# Altium PCB PCB.PcbDoc
Units mm, origin at the board's own origin, x right, y up, seen from the top; angles counter-clockwise.
Board outline 28.16 x 27.13 mm, 2 copper layers (Top Layer, Bottom Layer); 14 components, 10 nets, 38 pads, 12 vias.
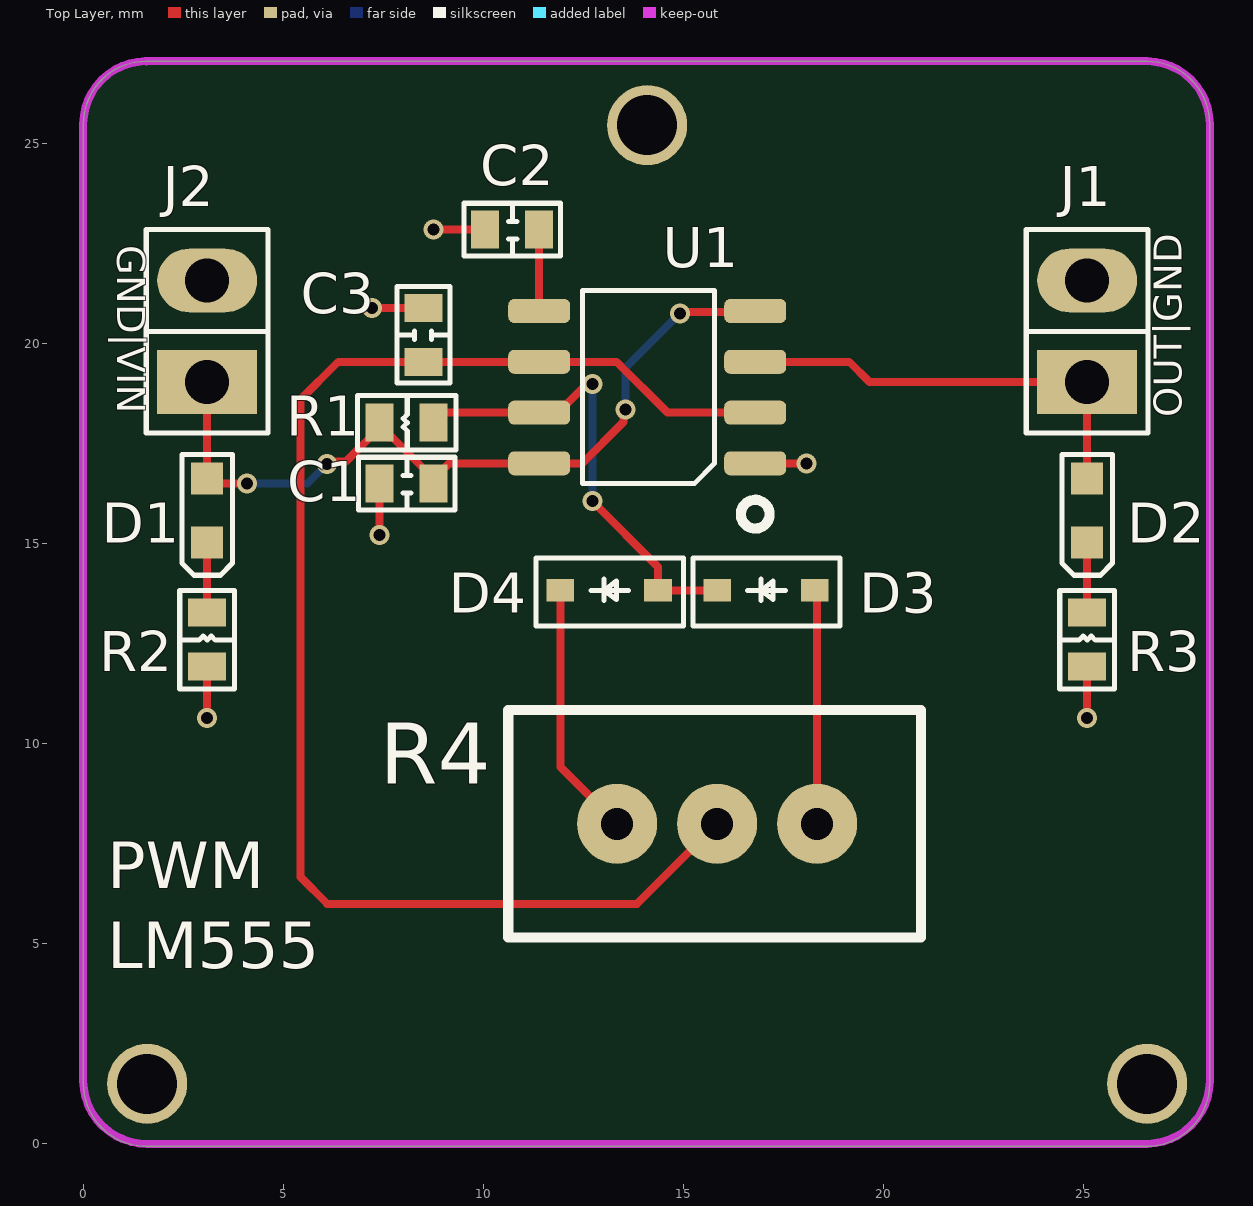
[diagram p0: Top Layer view]
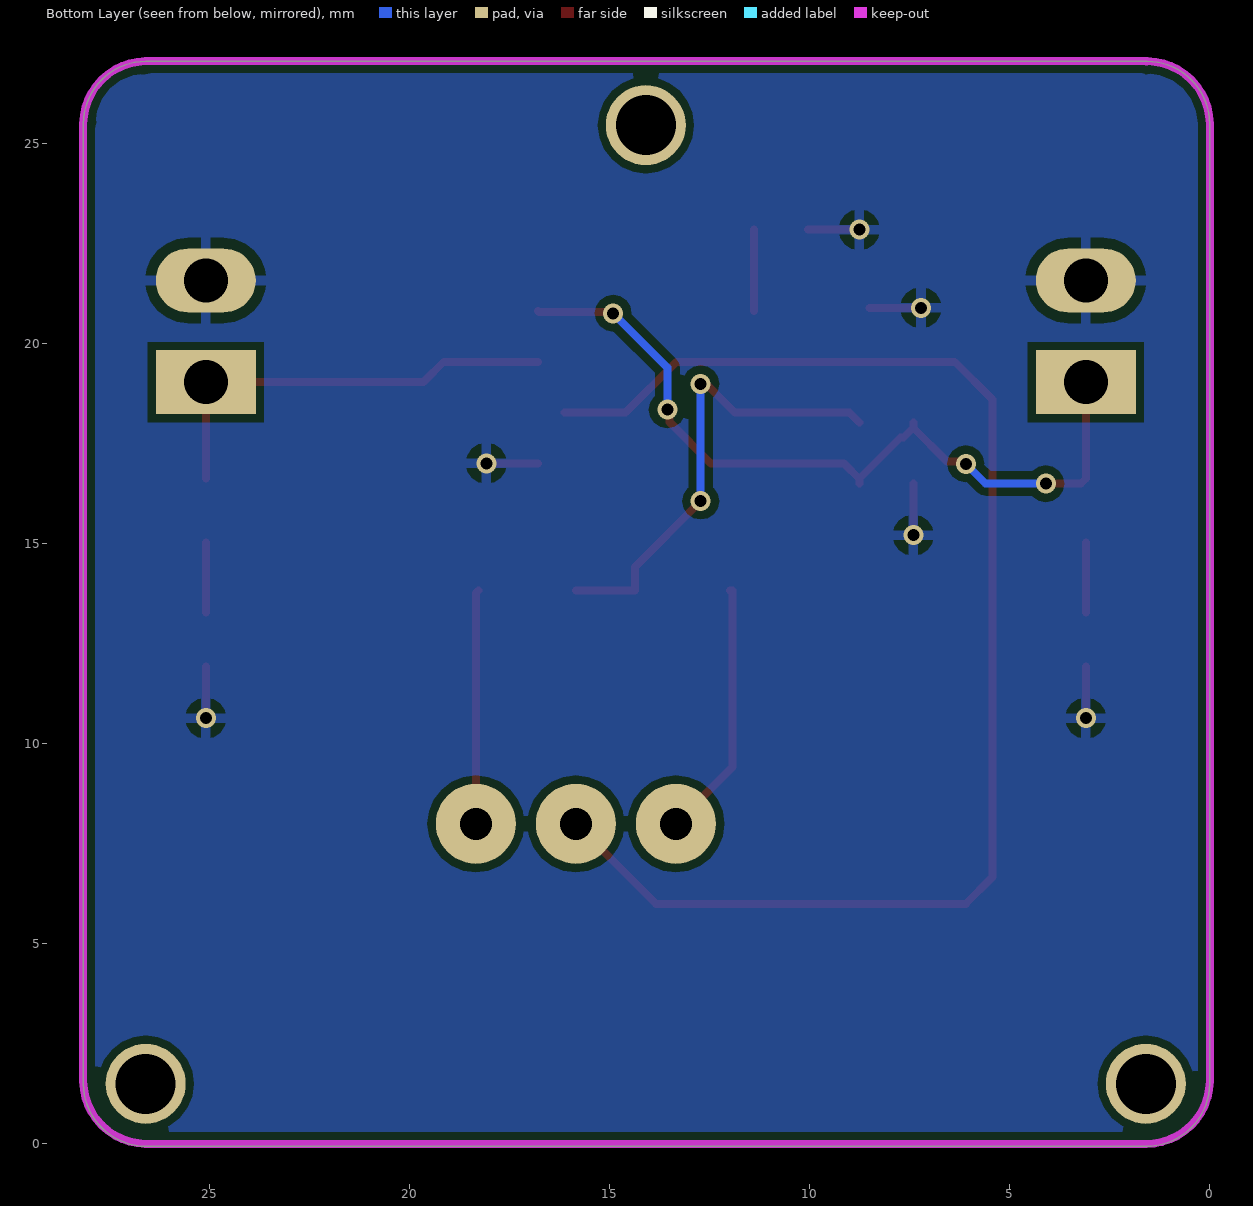
[diagram p1: Bottom Layer view, seen from below]
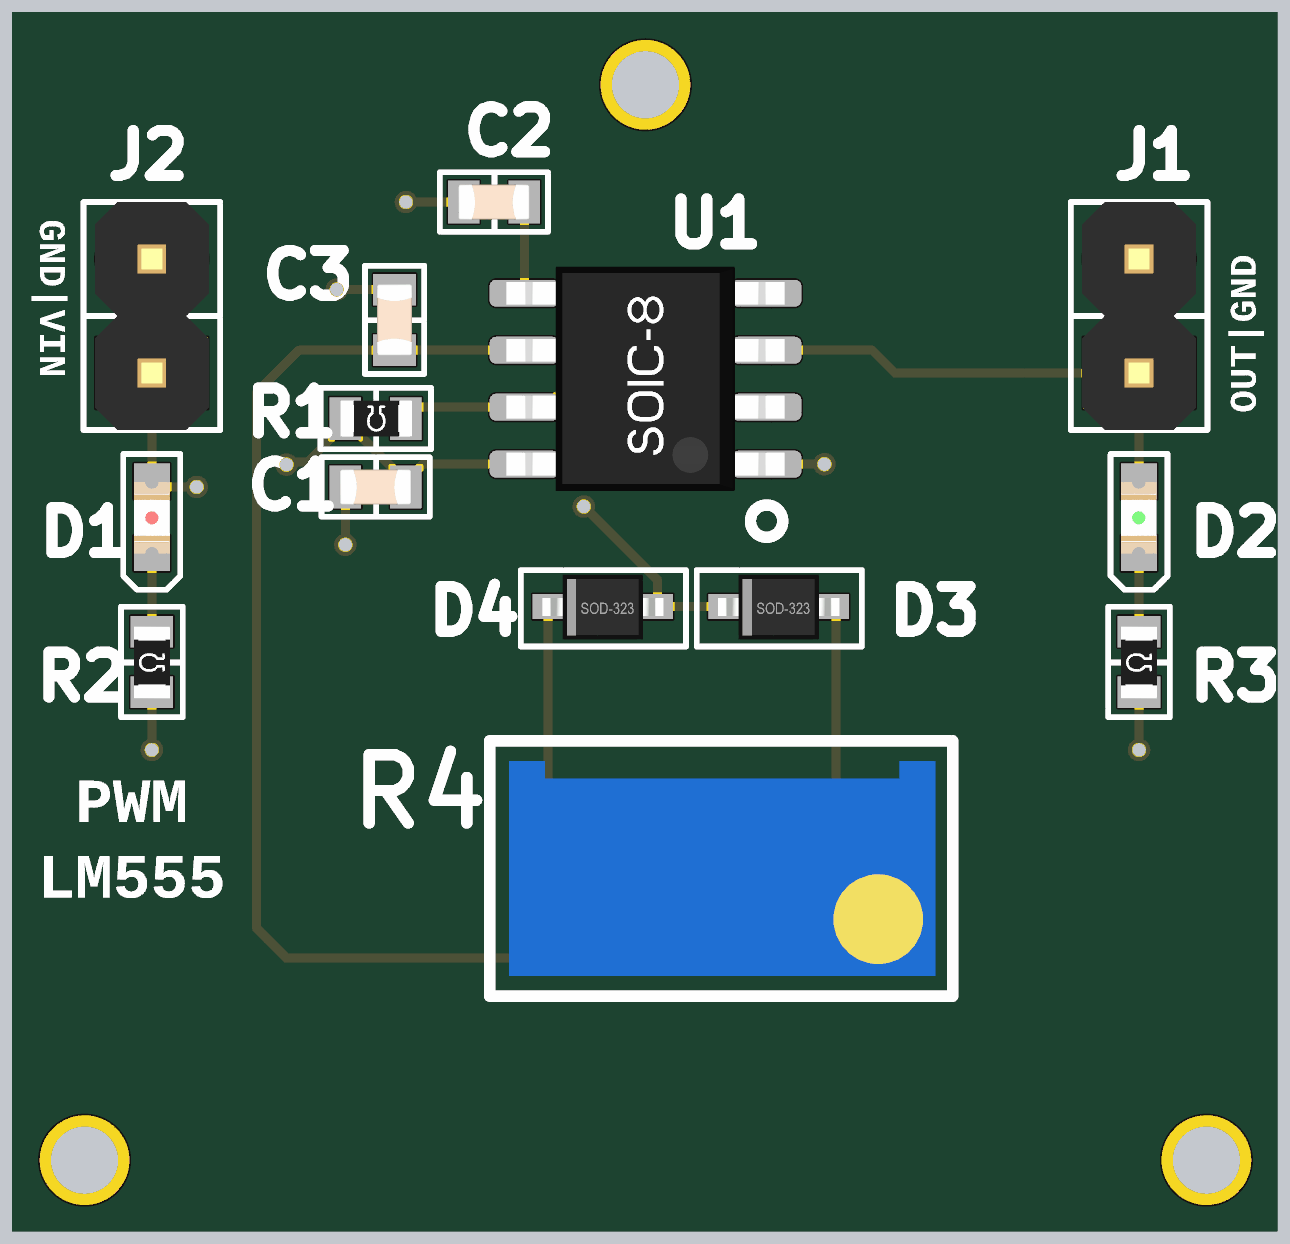
[diagram p2: 3D render of the assembled board from above, using the file's embedded part models]

## Layer stack, top to bottom
Top Solder: solder mask 0.0102, Solder Resist, Dk 3.5
Top Layer: signal copper 0.0356
Dielectric 1: dielectric 0.32, FR-4, Dk 4.8
Bottom Layer: signal copper 0.0356
Bottom Solder: solder mask 0.0102, Solder Resist, Dk 3.5

## Board outline
0,1.499 cw(c0.064,1.5) 0,1.501 0,25.464 cw(c1.582,25.482) 0,25.501 cw(c1.582,25.482) 1.563,27.064 cw(c1.564,27) 1.582,27.061 cw(c1.6,27) 1.6,27.064 26.6,27.064 cw(c26.6,27) 26.601,27.064 cw(c26.582,25.482) 28.164,25.501 cw(c28.1,25.5) 28.164,25.5 28.164,25.501 cw(c26.582,25.482) 28.164,25.482 cw(c26.582,25.482) 28.164,25.464 28.164,1.5 ccw(c28.1,1.5) 28.164,1.501 28.164,1.5 cw(c28.1,1.5) 28.164,1.499 cw(c26.582,1.518) 26.601,-0.064 cw(c26.6,0) 26.6,-0.064 26.601,-0.064 cw(c26.582,1.518) 26.564,-0.064 cw(c26.582,1.518) 26.563,-0.064 26.564,-0.064 1.6,-0.064 ccw(c1.582,1.518) 1.601,-0.064 1.6,-0.064 cw(c1.582,1.518)

## Design rules (kind name [scope] priority, off if disabled: settings)
Clearance [All] p1: gap=0.2 ignorepadtopadclearanceinfootprint=FALSE except(0.3: Arc-Text Arc-Hole Track-Text Track-Hole SMDPad-Text SMDPad-Hole THPad-Text THPad-Hole Via-Text Via-Hole Fill-Text Fill-Hole Poly-Text Poly-Hole Region-Text Region-Hole Text-Text Text-Hole)
HoleToHoleClearance [All] p1: gap=0.25 allowstackedmicrovias=TRUE
MinimumAnnularRing [All] p1: minimumring=0.1
MinimumSolderMaskSliver [All] p1: minsoldermaskwidth=0.1
PolygonConnect [All] p1: connectstyle=Relief reliefconductorwidth=0.254 reliefentries=4 polygonreliefangle="90 Angle" airgapwidth=0.254
RoutingVias [All] p1: holewidth=0.2 width=0.5 viastyle="Through Hole" minholewidth=0.3 minwidth=0.45 maxholewidth=1 maxwidth=1
SilkToSolderMaskClearance [IsPad] p1: minsilkscreentomaskgap=0.11 clearancetoexposedcopper=TRUE
SolderMaskExpansion [All] p1: expansion=0.038
Width [All] p1: maxlimit=5 minlimit=0.16 preferedwidth=0.2 bottomlayer_maxwidth=0.254 minimp=50.000000 maximp=50.000000 favimp=50.000000
27 further rules are at their usual default settings.

## Components (designator, comment, footprint, x,y, rotation, side; value= is the part's Value field where it differs from the comment)
C1 "100nF" "CAP 0603" 7.412,16.502 r0 top
C2 "10nF" "CAP 0603" 10.05,22.852 r0 top
C3 "68nF" "CAP 0603" 8.508,20.9 r270 top
D1 "LED RED" "LED RED" 3.1,16.627 r270 top
D2 "LED GREEN" "LED GREEN" 25.1,16.627 r270 top
D3 "Diode" SOD-323 18.288,13.835 r180 top
D4 "Diode" SOD-323 14.369,13.835 r180 top
J1 "Connector" "WR-PHD Pin Header" 25.1,19.042 r90 top
J2 "Connector" "WR-PHD Pin Header" 3.1,19.042 r90 top
R1 "1kR" "RES 0603" 8.762,18.026 r180 top
R2 "1kR" "RES 0603" 3.1,11.93 r90 top
R3 "1kR" "RES 0603" 25.1,11.93 r90 top
R4 "20kR" 3296W-V 18.348,8 r180 top
U1 "LM555CMX/NOPB" SOIC 16.8,17.01 r180 top

## Footprints (in the part's own frame and the unit in brackets; to place one, negate y for a bottom-side part, rotate by r counter-clockwise, add the part's x,y. Pads: shape width x height; smd on the part's side, far side on the other; paste and mask are expansions set on the pad)
3296W-V [mm]
  round 2 hole 0.8: 1(0,0) 2(2.5,0) 3(5,0)
  silkscreen extent -2.6,-2.84 7.72,2.85, body extent -2.21,-2.4 7.29,2.4, height 11.5
"CAP 0603" [mm]
  rect 0.7x0.95 smd: 1(0,0) 2(1.35,0)
  silkscreen extent -0.53,-0.66 1.88,0.66, body extent -0.13,-0.4 1.47,0.4, height 0.81
"LED GREEN" [mm]
  rect 0.8x0.8 smd: 1(1.6,0) 2(0,0)
  silkscreen extent -0.61,-0.64 2.41,0.64, body extent 0.01,-0.41 1.61,0.39, height 0.55
"LED RED" [mm]
  rect 0.8x0.8 smd: 1(1.6,0) 2(0,0)
  silkscreen extent -0.61,-0.64 2.41,0.64, body extent 0.01,-0.4 1.61,0.4, height 0.55
"RES 0603" [mm]
  rect 0.7x0.95 smd: 1(0,0) 2(1.35,0)
  silkscreen extent -0.56,-0.69 1.91,0.69, body extent -0.14,-0.4 1.46,0.4, height 0.47
SOD-323 [mm]
  rect 0.69x0.56 smd: 1(0,0) 2(2.44,0)
  silkscreen extent -0.64,-0.81 3.05,0.89, body extent -0.13,-0.71 2.57,0.74, height 1.17
SOIC [mm]
  rrect50% 1.55x0.6 smd: 1(0,0) 2(0,-1.27) 3(0,-2.54) 4(0,-3.81) 5(5.4,-3.81) 6(5.4,-2.54) 7(5.4,-1.27) 8(5.4,0)
  silkscreen extent -0.36,-4.32 4.32,1.63, body extent -0.4,-4.4 5.8,0.6, height 1.9
"WR-PHD Pin Header" [mm] "2 pin header connector 2.53 mm pitch"
  rect 1.6x2.5 hole 1.1: 1(0,0)
  oval 1.6x2.5 hole 1.1: 2(2.54,0)
  silkscreen extent -1.27,-1.52 3.81,1.52, body extent -1.27,-1.27 3.81,1.27, height 8.54

## Part data
C1: library part "CAP  0603 100nF 10% 50 V", "0.1 µF ±10% 50V Ceramic Capacitor X7R 0603 (1608 Metric)", Case/Package=0603, Case Code (Metric)=1608, Dielectric=X7R, Manufacturer=Samsung, Manufacturer Part Number=CL10B104KB8NNNC, Max Operating Temperature=125°C, Min Operating Temperature=-55°C, Package Quantity=1, Supplier Part Number 1=1276-1000-2-ND, Tolerance=10%, Voltage=50V, Capacitance=100nF, Case Code (Imperial)=0603, ComponentLink1Description=https://datasheet.ciiva.com/25803/cl10b104kb8nnnc-25803393.pdf?src-supplier=Digikey, ComponentLink1URL=https://datasheet.ciiva.com/25803/cl10b104kb8nnnc-25803393.pdf?src-supplier=Digikey, ComponentLink2Description=https://datasheet.ciiva.com/26838/getdatasheetpartid-89097-26838411.pdf?src-supplier=Verical, ComponentLink2URL=https://datasheet.ciiva.com/26838/getdatasheetpartid-89097-26838411.pdf?src-supplier=Verical, ComponentLink3Description=https://datasheet.ciiva.com/29198/456651-da-01-en-vs-kondensator-0605-29198839.pdf?src-supplier=Conrad, ComponentLink3URL=https://datasheet.ciiva.com/29198/456651-da-01-en-vs-kondensator-0605-29198839.pdf?src-supplier=Conrad, Construction=Flat, Depth=0.8mm, Height=0.8mm, Lead Free="Lead Free", Length=1.6mm, Material=Ceramic, Mount="Surface Mount", Packaging="Tape and Reel", Pricing 1="4000 = 0.00562, 8000 = 0.00513, 12000 = 0.00489, 28000 = 0.00464, 100000 = 0.00336, 200000 = 0.00325, 400000 = 0.00306 (USD)", Radiation Hardening=No, RoHS=Yes, RoHS Compliant=Yes, Series=CL, Stock 1=6418947, Supplier 1=Digikey, Thickness=0.035inch, Voltage Rating=50V, Voltage Rating (DC)=50V, Width=0.031inch
C2: library part "CAP  0603 10nF 10% 50 V", "10000 pF ±10% 50V Ceramic Capacitor X7R 0603 (1608 Metric)", Case/Package=0603, Dielectric=X7R, Manufacturer=Samsung, Manufacturer Part Number=CL10B103KB8NNND, Max Operating Temperature=125°C, Min Operating Temperature=-55°C, Supplier Part Number 1=1276-CL10B103KB8NNNDDKR-ND, Tolerance=10%, Voltage=50V, Capacitance=10nF, ComponentLink1Description=https://datasheet.ciiva.com/15195/getdatasheetpartid-357416-15195722.pdf?src-supplier=Verical, ComponentLink1URL=https://datasheet.ciiva.com/15195/getdatasheetpartid-357416-15195722.pdf?src-supplier=Verical, ComponentLink2Description=https://datasheet.ciiva.com/29198/457468-da-01-en-vs-kondensator-0603-29198646.pdf?src-supplier=Conrad, ComponentLink2URL=https://datasheet.ciiva.com/29198/457468-da-01-en-vs-kondensator-0603-29198646.pdf?src-supplier=Conrad, ComponentLink3Description=https://datasheet.ciiva.com/26310/mlcc-catalogdownload2013-eng-26310335.pdf?src-supplier=Distrelec, ComponentLink3URL=https://datasheet.ciiva.com/26310/mlcc-catalogdownload2013-eng-26310335.pdf?src-supplier=Distrelec, ComponentLink4Description=https://datasheet.ciiva.com/16449/clseries-16449357.pdf?src-supplier=Future+Electronics, ComponentLink4URL=https://datasheet.ciiva.com/16449/clseries-16449357.pdf?src-supplier=Future+Electronics, Construction=Flat, Depth=0.8mm, Height=0.8mm, Length=1.6mm, Material=Ceramic, Mount="Surface Mount", Packaging="Tape and Reel", Pricing 1="1 = 0.1, 10 = 0.023, 50 = 0.0134, 100 = 0.0103, 500 = 0.00778, 1000 = 0.00611, 2500 = 0.00556, 5000 = 0.00511 (USD)", Radiation Hardening=No, RoHS=Yes, RoHS Compliant=Yes, Series=CL, Stock 1=27368, Supplier 1=Digikey, Voltage Rating=50V
C3: library part "CAP 0603  68nF 10% 50 V", "0.068 µF ±10% 50V Ceramic Capacitor X7R 0603 (1608 Metric)", Case/Package=0603, Case Code (Metric)=1608, Manufacturer=Samsung, Manufacturer Part Number=CL10B683KB8WPNC, Max Operating Temperature=125°C, Min Operating Temperature=-55°C, Ratings=AEC-Q200, Supplier Part Number 1=1276-6541-6-ND, Tolerance=10%, Voltage Rating=50V, Capacitance=68nF, Case Code (Imperial)=0603, ComponentLink1Description=http://www.samsungsem.com/kr/support/product-search/mlcc/CL10B683KB8WPNC.jsp?src-supplier=Digikey, ComponentLink1URL=http://www.samsungsem.com/kr/support/product-search/mlcc/CL10B683KB8WPNC.jsp?src-supplier=Digikey, ComponentLink2Description=http://www.samsungsem.com/servlet/FileDownload?type=spec&file=CL10B683KB8WPNC.pdf&src-supplier=Avnet, ComponentLink2URL=http://www.samsungsem.com/servlet/FileDownload?type=spec&file=CL10B683KB8WPNC.pdf&src-supplier=Avnet, ComponentLink3Description=https://datasheet.octopart.com/CL10B683KB8WPNC-Samsung-Electro-Mechanics-datasheet-140815187.pdf?src-supplier=Future+Electronics, ComponentLink3URL=https://datasheet.octopart.com/CL10B683KB8WPNC-Samsung-Electro-Mechanics-datasheet-140815187.pdf?src-supplier=Future+Electronics, Height=900um, Material=Ceramic, Mount="Surface Mount", Packaging="Cut Tape", Pricing 1="1 = 0.1, 10 = 0.029, 50 = 0.02, 100 = 0.0172, 500 = 0.01234, 1000 = 0.01083 (USD)", RoHS=Yes, RoHS Compliant=Yes, Series=CL, Stock 1=223970, Supplier 1=Digikey
D1: "Red 625nm LED Indication - Discrete 2V 0603 (1608 Metric)", Case/Package=0603, Case Code (Metric)=1608, Color=Red, Forward Current=30mA, Forward Voltage=2V, Lens Color=Colorless, Manufacturer="Wurth Electronics", Manufacturer Part Number=150060RS75000, Max Operating Temperature=85°C, Max Reverse Voltage (DC)=5V, Min Operating Temperature=-40°C, Package Quantity=1, Power Dissipation=72mW, Supplier Part Number 1=732-4978-1-ND, Test Current=20mA, Case Code (Imperial)=0603, ComponentLink1Description=https://datasheet.ciiva.com/29563/150060rs75000-29563040.pdf?src-supplier=Digikey, ComponentLink1URL=https://datasheet.ciiva.com/29563/150060rs75000-29563040.pdf?src-supplier=Digikey, Dominant Wavelength=625nm, Height=0.8mm, Length=1.6mm, Lens Size=0.7mm, Lens Style=Clear,Flat,Rectangular, Lens Transparency=Clear, Luminous Intensity=250mcd, Mount="Surface Mount", Packaging="Cut Tape", Pricing 1="1 = 0.15, 50 = 0.142, 100 = 0.122, 500 = 0.105, 1000 = 0.10125 (USD)", Reach SVHC Compliant=Unknown, Reverse Voltage=5V, RoHS=Yes, RoHS Compliant=Yes, Series=WL-SMCW, Stock 1=110901, Supplier 1=Digikey, Viewing Angle=140°, Wavelength=625nm, Width=0.8mm
D2: "Green 520nm LED Indication - Discrete 3.2V 0603 (1608 Metric)", Case/Package=0603, Case Code (Metric)=1608, Color=Green, Forward Current=30mA, Forward Voltage=3.2V, Lens Color=Colorless, Manufacturer="Wurth Electronics", Manufacturer Part Number=150060GS75000, Max Operating Temperature=85°C, Max Reverse Voltage (DC)=5V, Min Operating Temperature=-40°C, Output Current=10uA, Package Quantity=1, Power Dissipation=105mW, Supplier Part Number 1=732-4971-1-ND, Test Current=20mA, Case Code (Imperial)=0603, ComponentLink1Description=https://datasheet.ciiva.com/29562/150060gs75000-29562868.pdf?src-supplier=Digikey, ComponentLink1URL=https://datasheet.ciiva.com/29562/150060gs75000-29562868.pdf?src-supplier=Digikey, ComponentLink2Description=https://datasheet.ciiva.com/29279/759427-da-01-en-chipled-0603-w-kl-gruen-150060gs75000-29279201.pdf?src-supplier=Conrad, ComponentLink2URL=https://datasheet.ciiva.com/29279/759427-da-01-en-chipled-0603-w-kl-gruen-150060gs75000-29279201.pdf?src-supplier=Conrad, ComponentLink3Description=https://datasheet.ciiva.com/29562/150060gs75000-29562869.pdf?src-supplier=Digikey, ComponentLink3URL=https://datasheet.ciiva.com/29562/150060gs75000-29562869.pdf?src-supplier=Digikey, ComponentLink4Description=https://datasheet.ciiva.com/29562/150060gs75000-29562870.pdf?src-supplier=Digikey, ComponentLink4URL=https://datasheet.ciiva.com/29562/150060gs75000-29562870.pdf?src-supplier=Digikey, Dominant Wavelength=520nm, Height=0.8mm, Lead Free="Lead Free", Length=1.6mm, Lens Size=0.7mm, Lens Style=Clear,Flat,Rectangular, Lens Transparency=Clear, Luminous Intensity=430mcd, Mount="Surface Mount", Packaging="Cut Tape", Pricing 1="1 = 0.15, 50 = 0.142, 100 = 0.122, 500 = 0.105 (USD)", Reach SVHC Compliant=Unknown, Reverse Voltage=5V, RoHS=Yes, RoHS Compliant=Yes, Series=WL-SMCW, Stock 1=149465, Supplier 1=Digikey, Viewing Angle=140°, Wavelength=520nm, Width=0.8mm
D3 D4: "Diode 75 V 150mA Surface Mount SOD-323", Average Rectified Current=150mA, Capacitance=2pF, Current Rating=300mA, Forward Voltage=1V, Manufacturer=MCC, Manufacturer Part Number=1N4148WX-TP, Max Forward Surge Current (Ifsm)=2A, Max Operating Temperature=150°C, Max Repetitive Reverse Voltage (Vrrm)=100V, Max Reverse Current=1uA, Max Reverse Leakage Current=5uA, Max Reverse Voltage (DC)=75V, Min Operating Temperature=-55°C, Package Quantity=1, Power Dissipation=400mW, Supplier Part Number 1=1N4148WXTPMSCT-ND, ComponentLink1Description=https://datasheet.ciiva.com/911/1n4148wxsod323-911680.pdf?src-supplier=Digikey, ComponentLink1URL=https://datasheet.ciiva.com/911/1n4148wxsod323-911680.pdf?src-supplier=Digikey, ComponentLink2Description=https://datasheet.ciiva.com/15200/getdatasheetpartid-139691-15200368.pdf?src-supplier=Verical, ComponentLink2URL=https://datasheet.ciiva.com/15200/getdatasheetpartid-139691-15200368.pdf?src-supplier=Verical, ComponentLink3Description=https://datasheet.ciiva.com/4435/1n4148wxsod323-24388-4435234.pdf?src-supplier=Mouser, ComponentLink3URL=https://datasheet.ciiva.com/4435/1n4148wxsod323-24388-4435234.pdf?src-supplier=Mouser, ComponentLink4Description=https://datasheet.ciiva.com/22747/1684831-22747440.pdf?src-supplier=Element14, ComponentLink4URL=https://datasheet.ciiva.com/22747/1684831-22747440.pdf?src-supplier=Element14, ComponentLink5Description=https://datasheet.ciiva.com/911/1n4148wxsod323-911681.pdf?src-supplier=Digikey, ComponentLink5URL=https://datasheet.ciiva.com/911/1n4148wxsod323-911681.pdf?src-supplier=Digikey, ComponentLink6Description=https://datasheet.ciiva.com/5807/1684831-5807581.pdf?src-supplier=Farnell, ComponentLink6URL=https://datasheet.ciiva.com/5807/1684831-5807581.pdf?src-supplier=Farnell, ComponentLink7Description=https://datasheet.ciiva.com/14557/70055520-14557894.pdf?src-supplier=Allied+Electronics, ComponentLink7URL=https://datasheet.ciiva.com/14557/70055520-14557894.pdf?src-supplier=Allied+Electronics, ComponentLink8Description=https://datasheet.ciiva.com/16836/1n4148wsod123-16836295.pdf?src-supplier=Future+Electronics, ComponentLink8URL=https://datasheet.ciiva.com/16836/1n4148wsod123-16836295.pdf?src-supplier=Future+Electronics, ComponentLink9Description=https://datasheet.ciiva.com/7622/1684831-7622557.pdf?src-supplier=Element14, ComponentLink9URL=https://datasheet.ciiva.com/7622/1684831-7622557.pdf?src-supplier=Element14, ComponentLink10Description=https://datasheet.ciiva.com/22638/1684831-22638796.pdf?src-supplier=Element14, ComponentLink10URL=https://datasheet.ciiva.com/22638/1684831-22638796.pdf?src-supplier=Element14, Forward Current=300mA, Height=1mm, Lead Free="Lead Free", Length=1.8mm, Max Surge Current=2A, Mount="Surface Mount", Number of Pins=2, Output Current=300mA, Packaging="Tape and Reel", Peak Non-Repetitive Surge Current=2A, Polarity=Standard, Pricing 1="1 = 0.1, 10 = 0.061, 100 = 0.0375, 500 = 0.02694, 1000 = 0.02349 (USD)", Radiation Hardening=No, Reach SVHC Compliant=Unknown, Recovery Time=4ns, Reverse Recovery Time=4ns, Reverse Recovery Time-Max=4ns, Reverse Voltage=100V, RoHS=Yes, RoHS Compliant=Yes, Series=1N4148, Stock 1=750805, Supplier 1=Digikey, Voltage Rating (DC)=75V, Width=1.35mm
J1 J2: "Connector Header Through Hole 2 position 0.100\" (2.54mm)", Color=Black, Contact Resistance=20mR, Current Rating=3A, Manufacturer="Wurth Electronics", Manufacturer Part Number=61300211121, Max Operating Temperature=125°C, Min Operating Temperature=-40°C, Operating Supply Voltage=250V, Supplier Part Number 1=732-5315-ND, ComponentLink1Description=https://datasheet.ciiva.com/13619/6130xx11121-48870-13619345.pdf?src-supplier=Mouser, ComponentLink1URL=https://datasheet.ciiva.com/13619/6130xx11121-48870-13619345.pdf?src-supplier=Mouser, Contact Gender=Male, Contact Material="Copper Alloy,Copper", Contact Mating Length=0.236inch, Contact Plating=Gold, Contact Type="Male Pin", Gender=29Gender, Height=8.94mm, Housing Material=PBT, Lead Free="Lead Free", Mount="Through Hole", Number of Contacts=2, Number of Positions=2, Number of Rows=1, Orientation=Vertical, Packaging=Bulk, Pitch=0.1inch, Pricing 1="1 = 0.13, 10 = 0.113, 25 = 0.094, 50 = 0.079, 100 = 0.071, 1000 = 0.065 (USD)", Reach SVHC Compliant=Unknown, RoHS=Yes, RoHS Compliant=Yes, Series=WR-PHD, Stock 1=71612, Supplier 1=Digikey, Termination="Through Hole", Voltage Rating=250V
R1 R2 R3: library part "RES  0603 1kR ±1% 0.1W", "1 kOhms ±1% 0.1W, 1/10W Chip Resistor 0603 (1608 Metric) Moisture Resistant Thick Film", Case/Package=0603, Case Code (Metric)=1608, Manufacturer=Yageo, Manufacturer Part Number=RC0603FR-071KL, Max Operating Temperature=155°C, Max Power Dissipation=100mW, Min Operating Temperature=-55°C, Resistance Tolerance=1%, Resistor Type="Thick Film", Supplier Part Number 1=4016291, Temperature Coefficient=100ppm/°C, Voltage Rating=50V, Case Code (Imperial)=0603, ComponentLink5Description=http://www.yageo.com/documents/recent/PYu-RC_Group_51_RoHS_L_9.pdf?src-supplier=Arrow+Electronics, ComponentLink5URL=http://www.yageo.com/documents/recent/PYu-RC_Group_51_RoHS_L_9.pdf?src-supplier=Arrow+Electronics, ComponentLink6Description=https://datasheet.octopart.com/RC0603FR-0710KL-Yageo-datasheet-15599030.pdf?src-supplier=Future+Electronics, ComponentLink6URL=https://datasheet.octopart.com/RC0603FR-0710KL-Yageo-datasheet-15599030.pdf?src-supplier=Future+Electronics, Construction=Rectangular, Contact Plating=Tin,Matte, Depth=0.8mm, Features="Moisture Resistant", Height=0.45mm, Lead Free="Lead Free", Length=1.6mm, Military Standard=Not, Number of Terminations=2, Packaging="Tape and Reel", Power Rating=100mW, Pricing 1="5000 = 0.0014, 50000 = 0.0014, 150000 = 0.0013, 375000 = 0.0013, 1000000 = 0.0012 (USD)", Reach SVHC Compliant=No, Resistance=1kR, RoHS=Yes, RoHS Compliant=Yes, Series=RC, Size Code=0603, Stock 1=15835000, Supplier 1="Future Electronics", Technology="THICK FILM", Termination=SMD/SMT, Tolerance=1%
R4: library part "POT RES  4030 20kR 5% 0.05W", "±10% 20kO Plugin Potentiometers, Variable Resistors ROHS", Color=Blue, Manufacturer 1=Bourns, Manufacturer 2=BOCHEN, Manufacturer Part Number 1=3296W-1-203, Max Operating Temperature=125°C, Max Power Dissipation=500mW, Min Operating Temperature=-55°C, Resistance Tolerance=10%, Resistor Type=Cermet, Supplier Part Number 1=3296W-203-ND, Temperature Coefficient=100ppm/°C, Voltage Rating (DC)=500V, ComponentLink1Description=https://datasheet.ciiva.com/8701/ptv09-8701401.pdf?src-supplier=Avnet, ComponentLink1URL=https://datasheet.ciiva.com/8701/ptv09-8701401.pdf?src-supplier=Avnet, ComponentLink2Description=https://datasheet.ciiva.com/2164/3296-2164078.pdf?src-supplier=Digikey, ComponentLink2URL=https://datasheet.ciiva.com/2164/3296-2164078.pdf?src-supplier=Digikey, ComponentLink3Description=https://datasheet.ciiva.com/8088/3296-8088796.pdf?src-supplier=Avnet, ComponentLink3URL=https://datasheet.ciiva.com/8088/3296-8088796.pdf?src-supplier=Avnet, ComponentLink4Description=https://datasheet.ciiva.com/30173/3296-30173435.pdf?src-supplier=Onlinecomponents.com, ComponentLink4URL=https://datasheet.ciiva.com/30173/3296-30173435.pdf?src-supplier=Onlinecomponents.com, ComponentLink5Description=https://datasheet.ciiva.com/15211/getdatasheetpartid-62505-15211741.pdf?src-supplier=Verical, ComponentLink5URL=https://datasheet.ciiva.com/15211/getdatasheetpartid-62505-15211741.pdf?src-supplier=Verical, ComponentLink6Description=https://datasheet.ciiva.com/1570/1815117-1570422.pdf?src-supplier=Newark, ComponentLink6URL=https://datasheet.ciiva.com/1570/1815117-1570422.pdf?src-supplier=Newark, Contact Plating=Tin,Lead, Depth=4.83mm, Lead Free="Contains Lead", Length=9.53mm, Manufacturer Part Number 2=3296W-1-203, Military Standard=Not, Mount="Through Hole,Panel", Number of Turns=25, Packaging=Rail/Tube, Power Rating=500mW, Pricing 1="1 = 4.43, 10 = 3.874, 25 = 3.4592, 50 = 3.2516, 100 = 3.1825, 250 = 3.04416, 500 = 2.49066, 1000 = 2.14474, 5000 = 1.93718 (USD)", Radiation Hardening=No, Reach SVHC Compliant=No, Resistance=20kR, RoHS=No, RoHS Compliant=No, Series="Trimpot® 3296 - Sealed", Stock 1=296, Supplier 1=Digikey, Supplier 2=LCSC, Supplier Part Number 2=C118936, Taper=Linear, Technology=CERMET, Termination=Pin, Tolerance=10%, Weight=0.03oz, Width=9.53mm
U1: "555 Type, Timer/Oscillator (Single) IC 100kHz 8-SOIC", Case/Package=SOIC, Current Rating=3mA, Frequency=100kHz, High Level Output Current=-200mA, Low Level Output Current=200mA, Manufacturer="TI National Semiconductor", Manufacturer Part Number=LM555CM/NOPB, Max Operating Temperature=70°C, Max Power Dissipation=1.18W, Max Supply Voltage=16V, Min Operating Temperature=0°C, Min Supply Voltage=4.5V, Operating Supply Current=10mA, Operating Supply Voltage=5V, Package Quantity=95, Supplier Part Number 1=LM555CM/NOPB-ND, ComponentLink1Description=https://datasheet.ciiva.com/19457/840579-19457377.pdf?src-supplier=Jameco, ComponentLink1URL=https://datasheet.ciiva.com/19457/840579-19457377.pdf?src-supplier=Jameco, ComponentLink2Description=https://datasheet.ciiva.com/6668/lm555-6668279.pdf?src-supplier=Digikey, ComponentLink2URL=https://datasheet.ciiva.com/6668/lm555-6668279.pdf?src-supplier=Digikey, ComponentLink3Description=https://datasheet.ciiva.com/14094/djnat-timer-lm-555c-en-14094965.pdf?src-supplier=Distrelec, ComponentLink3URL=https://datasheet.ciiva.com/14094/djnat-timer-lm-555c-en-14094965.pdf?src-supplier=Distrelec, ComponentLink4Description=https://datasheet.ciiva.com/1492/1902863-1492440.pdf?src-supplier=Element14, ComponentLink4URL=https://datasheet.ciiva.com/1492/1902863-1492440.pdf?src-supplier=Element14, ComponentLink5Description=https://datasheet.ciiva.com/3305/lm555-3305560.pdf?src-supplier=Avnet, ComponentLink5URL=https://datasheet.ciiva.com/3305/lm555-3305560.pdf?src-supplier=Avnet, Height=1.45mm, Lead Free="Lead Free", Length=4.9mm, Mount="Surface Mount", Number of Channels=1, Number of Pins=8, Number of Timers/Counters=1, Output Current=200mA, Packaging=Rail/Tube, Power Dissipation=1.18W, Pricing 1="1 = 1.37, 10 = 1.228, 95 = 0.95705, 285 = 0.89467, 570 = 0.79063, 1045 = 0.62418, 2565 = 0.58257, 5035 = 0.55344 (USD)", Quiescent Current=3mA, Radiation Hardening=No, Reach SVHC Compliant=No, RoHS=Yes, RoHS Compliant=Yes, Series=-, Stock 1=2526, Supplier 1=Digikey, Supply Current=3mA, Termination=SMD/SMT, Thickness=1.58mm, Voltage=16V, Width=3.9mm

## Free pads (board coordinates)
  round 2 hole 1.5: 3(1.6,1.5) 4(26.601,1.5) 5(14.1,25.464)

## Via types
v1: diameter 0.5, hole 0.3, Top Layer to Bottom Layer, tented both sides, 12 vias

## Nets (pads, with @x,y where several pads share a name; then routed paths per layer and width w, separated by ;. In a path a pad name is that pad's centre, name@x,y a point inside that pad or via, vN(x,y) a via of type N, cw(c..) or ccw(c..) an arc to the next point about the centre after c; other vN are vias at no path point)
5V0: C1.2 D1.2 J2.1 R1.2 U1.4 U1.8 | length 20
  Top Layer w0.2: J2.1 D1.2 3.225,16.502 v1(4.1,16.502) ; v1(6.1,17) 6.157,17.057 6.568,17.057 R1.2@7.412,17.901 ; R1.2 R1.2@7.412,17.901 ; C1.2 C1.2@8.762,16.627 ; v1(13.562,18.352) 13.504,18.295 13.504,18.041 12.474,17.01 U1.8 9.145,17.01 C1.2@8.762,16.627 ; v1(14.917,20.761) 14.946,20.791 16.77,20.791 U1.4 ; R1.2@7.412,17.901 7.662,17.651 7.738,17.651 C1.2@8.762,16.627
  Bottom Layer w0.2: v1(4.1,16.502) 5.602,16.502 v1(6.1,17) ; v1(13.562,18.352) 13.562,19.406 v1(14.917,20.761)
GND: C1.1 C2.1 C3.1 J1.2 J2.2 R2.1 R3.1 U1.1 | length 7.7
  Top Layer w0.2: v1(3.1,10.642) R2.1 ; v1(7.22,20.9) C3.1 ; v1(7.412,15.214) C1.1 ; v1(8.762,22.852) C2.1 ; U1.1 v1(18.088,17.01) ; v1(25.1,10.642) R3.1
NetC2_2: C2.2 U1.5 | length 2
  Top Layer w0.2: U1.5 C2.2
NetD1_1: D1.1 R2.2 | length 1.7
  Top Layer w0.2: R2.2 D1.1
NetD2_1: D2.1 R3.2 | length 1.7
  Top Layer w0.2: R3.2 D2.1
NetD3_1: D3.1 R4.1 | length 5.9
  Top Layer w0.2: D3.1 18.348,13.775 R4.1
NetD3_2: D3.2 D4.1 R1.1 U1.7 | length 11.7
  Top Layer w0.2: R1.1 8.762,18.03 9.012,18.28 U1.7 11.875,18.28 12.595,19 v1(12.726,19) ; v1(12.726,16.066) 14.369,14.422 D4.1 D3.2
  Bottom Layer w0.2: v1(12.726,16.066) v1(12.726,19)
NetD4_2: D4.2 R4.3 | length 6.5
  Top Layer w0.2: D4.2@11.994,13.835 D4.2 11.929,9.418 R4.3
Output: D2.2 J1.1 U1.3 | length 10.9
  Top Layer w0.2: U1.3 19.15,19.55 19.658,19.042 J1.1 D2.2
Trigger: C3.2 R4.2 U1.2 U1.6 | length 35.1
  Top Layer w0.2: R4.2 13.848,6 6.1,6 5.434,6.666 5.434,18.606 6.378,19.55 C3.2 U1.6 13.334,19.55 14.604,18.28 U1.2@16.128,18.28

## Polygon pours and split planes (outlines as drawn)
GND on Bottom Layer "Bottom Layer-GND" (solid, remove dead copper, pour order 14): 28.04,26.988 28.04,-4 0.1,-4 0.1,26.988

## Keep-outs
Keep-Out Layer:
  lines w0.2: 26.564,0 1.6,0 cw(c1.582,1.582) 0,1.563 0,25.464 ; 26.601,0 ccw(c26.582,1.582) 28.164,1.563 ; 0,25.464 cw(c1.582,25.482) 0,25.501 ; 0,25.464 cw(c1.582,25.482) 0,25.501 ; 0,25.501 cw(c1.582,25.482) 1.563,27.064 ; 0,25.501 cw(c1.582,25.482) 1.563,27.064 ; 1.563,27.064 cw(c1.564,27) 1.582,27.061 ; 1.563,27.064 cw(c1.564,27) 1.582,27.061 ; 1.582,27.061 cw(c1.6,27) 1.6,27.064 ; 1.582,27.061 cw(c1.6,27) 1.6,27.064 ; 1.582,27.061 1.582,27.061 ; 1.582,27.061 1.582,27.061 ; 1.6,27.064 26.6,27.064 ; 1.6,27.064 26.6,27.064 ; 26.601,27.064 cw(c26.582,25.482) 28.164,25.501 ; 26.601,27.064 ccw(c26.6,27) 26.6,27.064 ; 26.601,27.064 cw(c26.582,25.482) 28.164,25.501 ; 26.601,27.064 ccw(c26.6,27) 26.6,27.064 ; 28.164,1.563 28.164,1.563 ; 28.164,1.563 28.164,25.464 ; 28.164,25.464 ccw(c26.582,25.482) 28.164,25.482 ; 28.164,25.464 ccw(c26.582,25.482) 28.164,25.482 ; 28.164,25.482 ccw(c26.582,25.482) 28.164,25.501 ; 28.164,25.482 ccw(c26.582,25.482) 28.164,25.501 ; 28.164,25.5 ccw(c28.1,25.5) 28.164,25.501 ; 28.164,25.5 ccw(c28.1,25.5) 28.164,25.501 ; 28.164,25.5 28.164,25.501 ; 28.164,25.5 28.164,25.501

## Silkscreen, mask and mechanical layers (free items; w line width, h text height)
Top Overlay:
  text "GND|VIN" at 0.608,22.467 h1.2 r270
  text "OUT|GND" at 27.7,18.157 h1.2 r90
  text "PWM  / LM555" at 0.6,4 h2
Mechanical 1:
  lines w0.127: 0.064,25.464 cw(c1.582,25.482) 1.564,27 ; 0.064,25.5 0.064,1.5 ccw(c1.582,1.518) 1.6,0 26.6,0 ; 1.6,27 26.6,27 cw(c26.582,25.482) 28.1,25.464 ; 26.564,0 ccw(c26.582,1.518) 28.1,1.5 28.1,25.5